# EAGLE board Releard - Arquivo do Projeto Elétrico (EAGLE 9.7.0)

Size 130.62 x 82.4 mm. Coordinates in mm from the lower left corner, seen from the top.
Outline: 0,0 130.62,0 130.62,82.4 0,82.4 0,0
Copper layers (1*16): Top 0.035mm / dielectric 1.5mm / Bottom 0.035mm
Design rules "default": minimum track width 6mil, minimum drill 0.35mm, track to track 6mil, track to pad 6mil, pad to pad 6mil, via to via 6mil, smd to smd 6mil, copper to edge 40mil, drill to drill 6mil, minimum pad ring 10mil, minimum via ring 8mil, stop-mask expansion 4mil, vias tented up to drill 0mil, thermal gap 10mil

## Footprints (pad centres in the part's own frame; a part is rotated, then mirrored left to right if it is on the bottom)
DIODE-AXIAL = drill 1: 1 -5.08,0; 2 5.08,0
BATTERY-GENERIC = drill 1.118 pad 3.15 octagon: + 2.54,0; - -2.54,0
LU-5-R = drill 0.8: 1 -6.35,-3.81; 5 3.81,-3.81; 6 6.35,-3.81; 7 6.35,3.81; 8 3.81,3.81; 12 -6.35,3.81
1X02 = drill 1.016 long: 1 -1.27,0; 2 1.27,0
RESAD1016W63L850D250B = drill 0.83 pad 1.43: 1 -5.08,0; 2 5.08,0
TO92 = drill 0.813 octagon: 1 -1.27,0; 2 0,1.905; 3 1.27,0
ARDUINO-UNO-R3-SHIELD = drill 1.016 pad 1.88: 3.3V 24.13,-2.54; 5V 24.13,0; A0 24.13,12.7; A1 24.13,15.24; A2 24.13,17.78; A3 24.13,20.32; A4 24.13,22.86; A5 24.13,25.4; AREF -24.13,-13.97; D2 -24.13,20.32; D3 -24.13,17.78; D4 -24.13,15.24; D5 -24.13,12.7; D6 -24.13,10.16; D7 -24.13,7.62; D8 -24.13,3.81; D9 -24.13,1.27; D10 -24.13,-1.27; D11 -24.13,-3.81; D12 -24.13,-6.35; D13 -24.13,-8.89; GND@0 24.13,2.54; GND@1 24.13,5.08; GND@2 -24.13,-11.43; IOREF 24.13,-7.62; NC 24.13,-10.16; RES 24.13,-5.08; RX -24.13,25.4; SCL -24.13,-19.05; SDA -24.13,-16.51; TX -24.13,22.86; VIN 24.13,7.62

## Placement (x,y rotation side)
D1  DIODEDIODE-AXIAL  [DIODE-AXIAL]  60.45,54.73 90 top
FUNC3  FUNCTION-GENERATOR  [BATTERY-GENERIC]  122.36,10.84 180 top
K1  RELAY-SPDT_LU-5-R  [LU-5-R]  71.79,55.21 180 top
L1  LIGHTBULB  [1X02]  102.85,59.39 0 top
P1  BATTERYGENERIC  [BATTERY-GENERIC]  81.59,10.56 180 top
R1  1k  [RESAD1016W63L850D250B]  63.11,43.35 180 top
T1  NPN  [TO92]  68.19,40.81 270 top
U1  ARDUINO-UNO-R3-SHIELD  [ARDUINO-UNO-R3-SHIELD]  29.84,34.52 180 top

## Library data of the parts
D1 FUNC3 K1 L1 P1 R1 U1 = Tinkercad
T1 = Tinkercad; CATEGORY: Transistor; SUB-CATEGORY: BJT; TYPE: NPN

## Nets
FUNC3+: FUNC3.+ K1.1
FUNC3-: FUNC3.- L1.2
L1_1: K1.6 L1.1
P1+: D1.2 K1.5 P1.+
P1-: P1.- T1.3 U1.GND@0 U1.GND@1 U1.GND@2
T1_C: D1.1 K1.8 R1.1 T1.1 T1.2
U1_D13: R1.2 U1.D13

## Tracks (layer width: path | path; a pad name or v marks a point on that pad's centre or on a via)
FUNC3+  (1 unrouted)
FUNC3-  (1 unrouted)
L1_1  (1 unrouted)
P1+  (2 unrouted)
P1-  (4 unrouted)
T1_C  (4 unrouted)
U1_D13  (1 unrouted)